# EAGLE board solar_collector_controller_V1.22 (EAGLE 6.5.0)
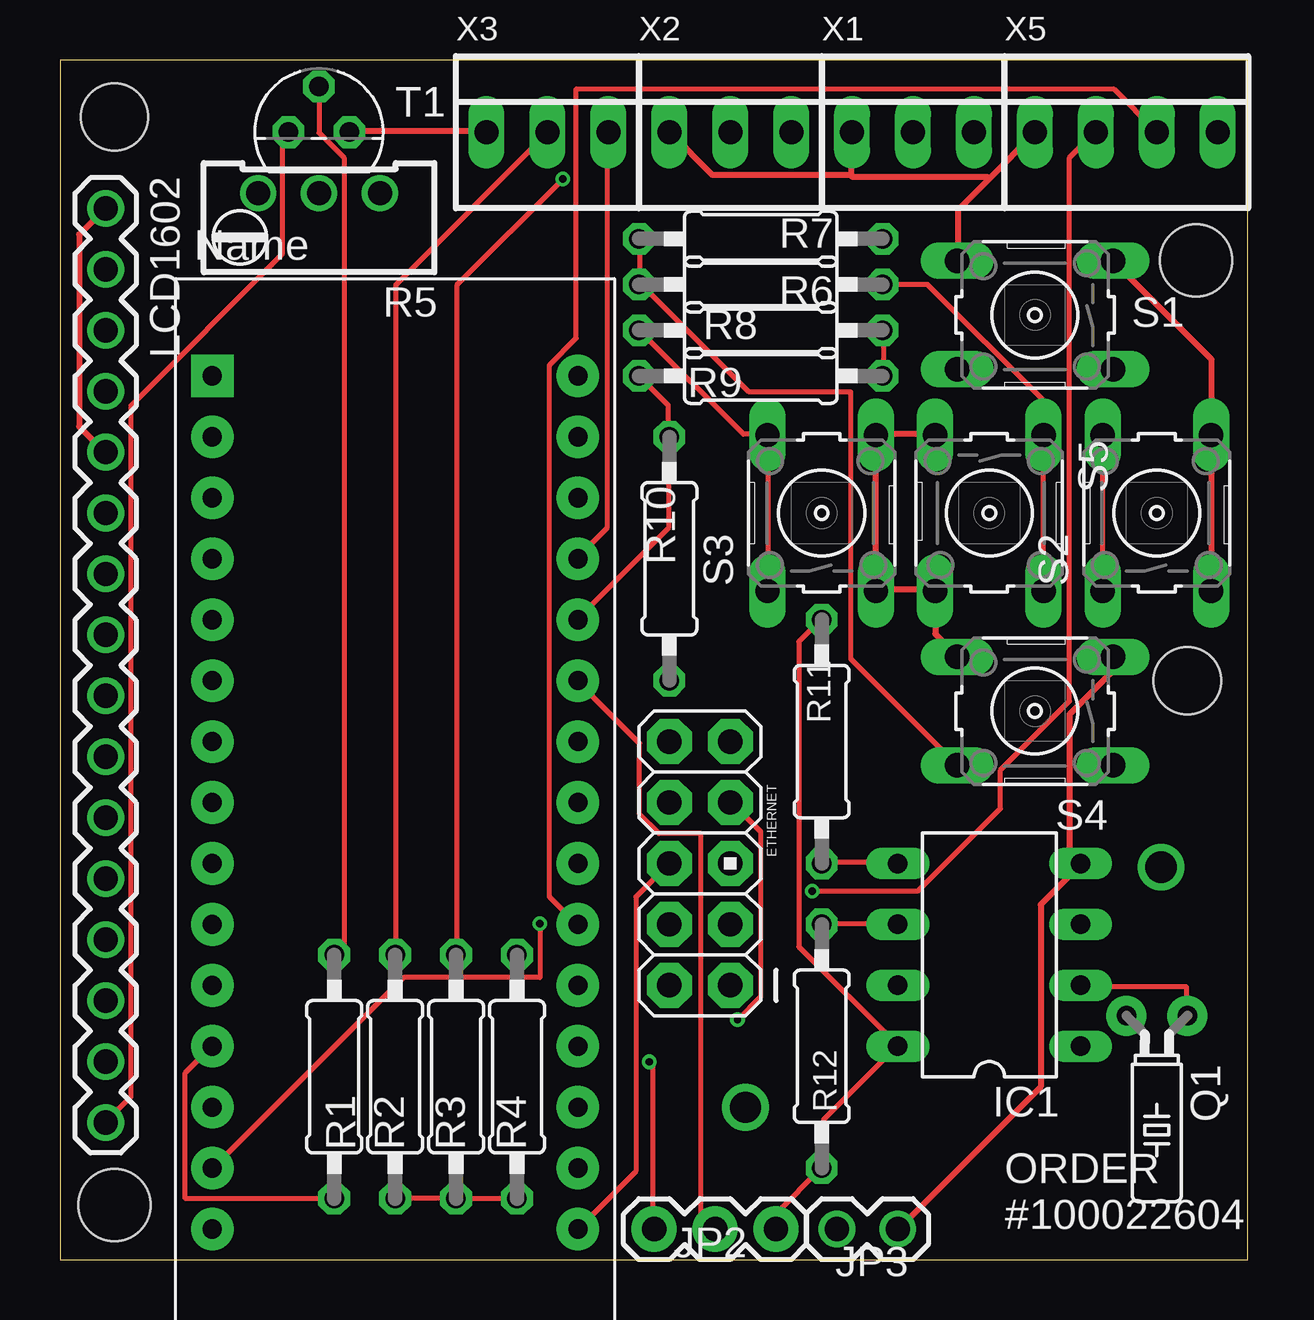
[diagram p0: board, top side]
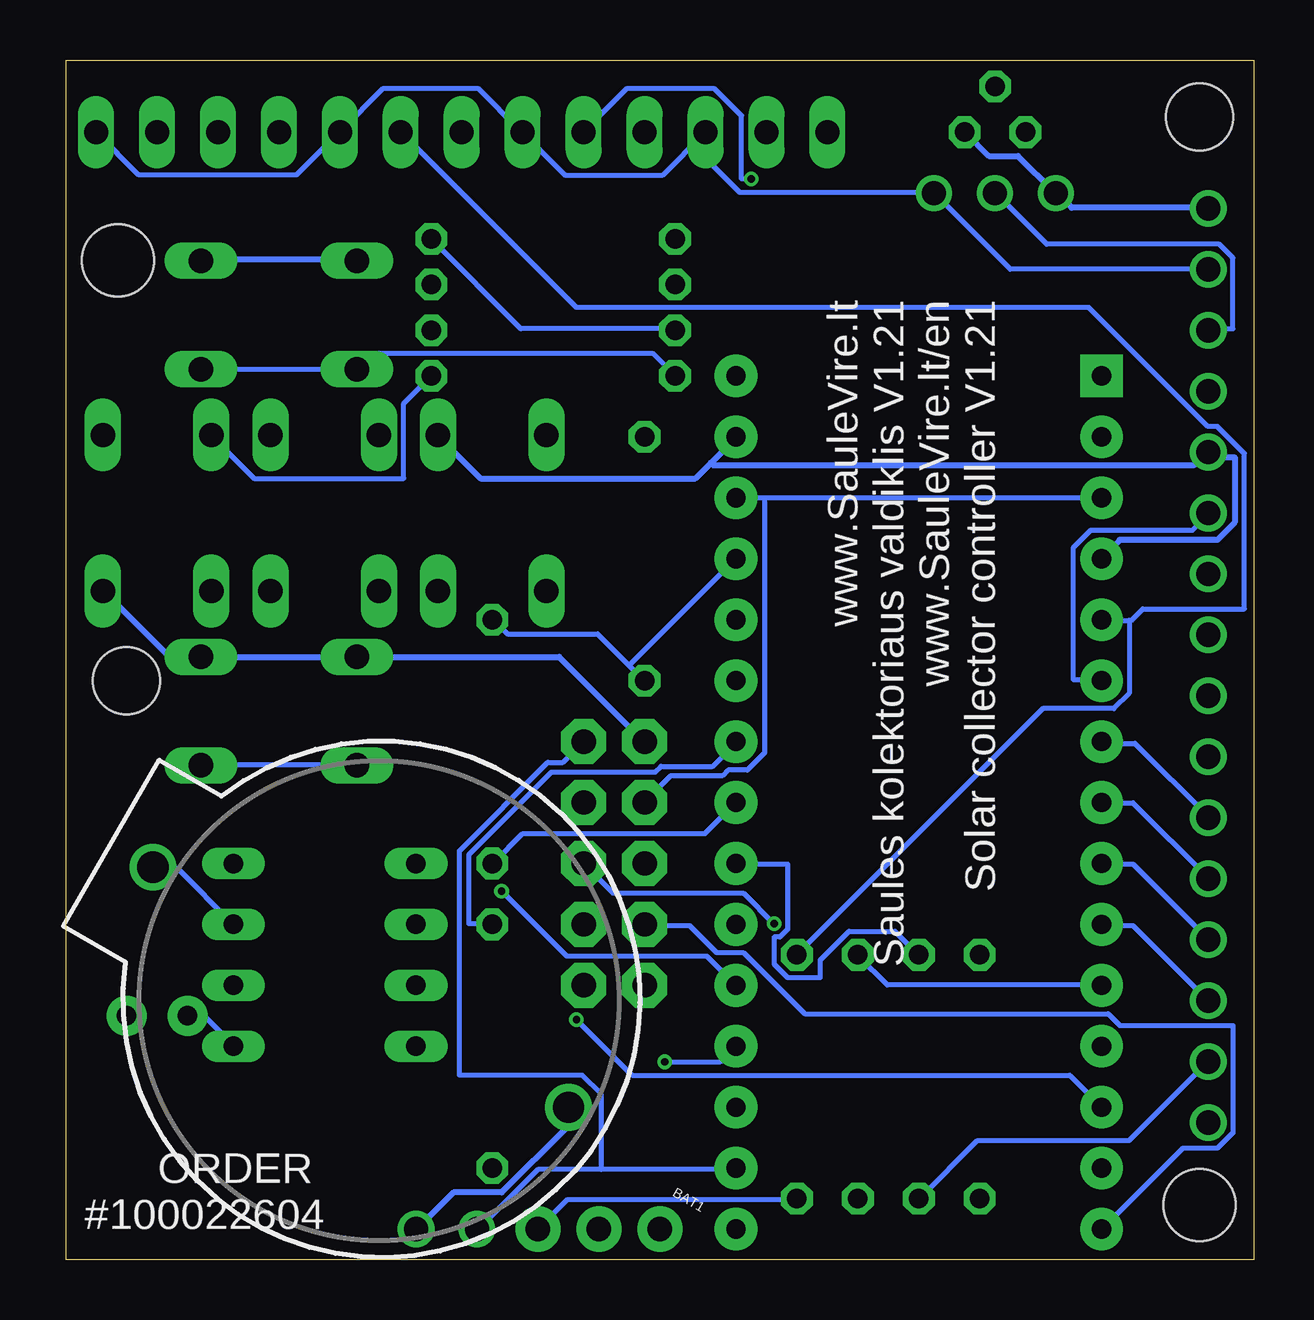
[diagram p1: board, bottom side, seen from below]

Size 49.51 x 50 mm. Coordinates in mm from the lower left corner, seen from the top.
Outline: 0,0 49.51,0 49.51,50 0,50 0,0
Copper layers (1*16): Top 0.035mm / dielectric 1.5mm / Bottom 0.035mm
Design rules "ITEADstudio_DRC": minimum track width 6mil, minimum drill 12mil, track to track 6mil, track to pad 6mil, pad to pad 6mil, via to via 6mil, smd to smd 0mil, copper to edge 10mil, drill to drill 10mil, minimum pad ring 10mil, minimum via ring 6mil, stop-mask expansion 2mil, vias tented up to drill 100mil, thermal gap 10mil
Net classes: 0 default: width 0.203 mm; 1 vcc: width 0.254 mm
Holes 3 mm at 2.27,2.27 47.35,41.64
Holes 2.8 mm at 2.27,47.62 46.99,24.13

## Footprints (pad centres in the part's own frame; a part is rotated, then mirrored left to right if it is on the bottom)
BATTCOM_20MM_PTH = drill 1.3: 1 20,0; 2 0,0
AVR_ICSP = drill 1.016 pad 1.88 octagon: 1 -1.27,5.08; 2 1.27,5.08; 3 -1.27,2.54; 4 1.27,2.54; 5 -1.27,0; 6 1.27,0; 7 -1.27,-2.54; 8 1.27,-2.54; 9 -1.27,-5.08; 10 1.27,-5.08
DIL08 = drill 0.813 long: 1 -3.81,-3.81; 2 -1.27,-3.81; 3 1.27,-3.81; 4 3.81,-3.81; 5 3.81,3.81; 6 1.27,3.81; 7 -1.27,3.81; 8 -3.81,3.81
1X03 = drill 1.016 pad 1.88: 1 0,0; 2 2.54,0; 3 5.08,0
1X02 = drill 1.016: 1 0,0; 2 2.54,0
16P-2.54 = drill 1.016: 1 0,0; 2 2.54,0; 3 5.08,0; 4 7.62,0; 5 10.16,0; 6 12.7,0; 7 15.24,0; 8 17.78,0; 9 20.32,0; 10 22.86,0; 11 25.4,0; 12 27.94,0; 13 30.48,0; 14 33.02,0; 15 35.56,0; 16 38.1,0
TC26H = drill 0.813 pad 1.676: 1 -1.27,0; 2 1.27,0
0207/10 = drill 0.813 octagon: 1 -5.08,0; 2 5.08,0
RTRIM64W = drill 1: 1 1.27,-2.54; 2 1.27,0; 3 1.27,2.54
B3F-10XX = drill 1.016 long: 1 -3.251,2.261; 2 3.251,2.261; 3 -3.251,-2.261; 4 3.251,-2.261
TO92 = drill 0.813 octagon: 1 1.27,0; 2 0,1.905; 3 -1.27,0
PDIP-32 = drill 0.8 pad 1.778: 3V3 15.24,-35.56; +5V 15.24,-10.16; A0 15.24,-30.48; A1 15.24,-27.94; A2 15.24,-25.4; A3 15.24,-22.86; A4 15.24,-20.32; A5 15.24,-17.78; A6 15.24,-15.24; A7 15.24,-12.7; AREF 15.24,-33.02; D0/RX 0,-5.08; D2 0,-12.7; D3 0,-15.24; D4 0,-17.78; D5 0,-20.32; D6 0,-22.86; D7 0,-25.4; D8 0,-27.94; D9 0,-30.48; D10 0,-33.02; D11 0,-35.56; D12 0,-38.1; D13 15.24,-38.1; GND 0,-10.16; GND1 15.24,-5.08; RESET 0,-7.62; RESET1 15.24,-7.62; VIN 15.24,-2.54 | drill 0.8 pad 1.778 square: D1/TX 0,-2.54
22-23-2031 = drill 1 long: 1 -2.54,0; 2 0,0; 3 2.54,0
22-23-2041 = drill 1 long: 1 -3.81,0; 2 -1.27,0; 3 1.27,0; 4 3.81,0

## Placement (x,y rotation side)
BAT1  [BATTCOM_20MM_PTH]  28.57,6.35 150 bottom
ETHERNET  ENC25J60  [AVR_ICSP]  26.67,16.51 180 top
IC1  DS1307  [DIL08]  38.73,12.7 90 top
JP2  A0 A6 +5V  [1X03]  29.84,1.27 180 top
JP3  GND 3.3V  [1X02]  32.38,1.27 0 top
LCD1602  LCD  [16P-2.54]  1.91,43.81 270 top
Q1  [TC26H]  45.72,10.16 180 top
R1  2k2  [0207/10]  11.43,7.62 270 top
R2  4k7  [0207/10]  13.97,7.62 90 top
R3  4k7  [0207/10]  16.51,7.62 90 top
R4  4k7  [0207/10]  19.05,7.62 90 top
R5  10k  [RTRIM64W]  10.79,43.18 90 top
R6  3k3  [0207/10]  29.21,40.64 180 top
R7  1k  [0207/10]  29.21,42.55 0 top
R8  620  [0207/10]  29.21,38.73 0 top
R9  330  [0207/10]  29.21,36.83 180 top
R10  2k  [0207/10]  25.4,29.21 270 top
R11  10k  [0207/10]  31.75,21.59 90 top
R12  10k  [0207/10]  31.75,8.89 270 top
S1  Right  [B3F-10XX]  40.64,39.37 180 top
S2  Up  [B3F-10XX]  45.72,31.11 90 top
S3  Down  [B3F-10XX]  31.75,31.11 90 top
S4  Left  [B3F-10XX]  40.64,22.86 180 top
S5  Select  [B3F-10XX]  38.73,31.11 270 top
T1  BC337  [TO92]  10.79,46.99 0 top
U$2  ARDUINONANO  [PDIP-32]  6.35,39.37 0 top
X1  VCC D2 GND  [22-23-2031]  35.56,46.99 0 top
X2  VCC D8 GND  [22-23-2031]  27.94,46.99 0 top
X3  VCC A3 GND  [22-23-2031]  20.32,46.99 0 top
X5  VCC A2 A1 GND  [22-23-2041]  44.45,46.99 0 top

## Library data of the parts
BAT1 = SparkFun-Electromechanical
ETHERNET JP2 = SparkFun-Connectors
IC1 = ds1307_pcf8583
JP3 = SparkFun
LCD1602 = Connector_seedstudio
Q1 = adafruit; OC_FARNELL: unknown; OC_NEWARK: unknown
R1-R12 = resistor
S1-S5 = switch-omron; MPN: B3F-1000; OC_FARNELL: 176432; OC_NEWARK: 36M3542
T1 = transistor
U$2 = rocketfarm
X1-X3 = con-molex; MF: MOLEX; MPN: 22-23-2031; OC_FARNELL: 1462950; OC_NEWARK: 30C0862
X5 = con-molex; MF: MOLEX; MPN: 22-23-2041; OC_FARNELL: 1462920; OC_NEWARK: 38C0355

## Nets
3.3V: ETHERNET.9 JP3.1 U$2.3V3
A0: JP2.3 U$2.A0
A1: U$2.A1 X5.2
A2: U$2.A2 X5.3
A3: R2.2 U$2.A3 X3.2
A4_SDA: IC1.5 R11.1 U$2.A4
A5: LCD1602.4
A5_SCL: IC1.6 R12.1 U$2.A5
A6: JP2.2 U$2.A6
A7: R9.2 R10.1 S1.1 S1.2 U$2.A7
D2: R4.2 U$2.D2 X1.2
D3: LCD1602.6 U$2.D3
D4: LCD1602.11 U$2.D4
D5: LCD1602.12 U$2.D5
D6: LCD1602.13 U$2.D6
D7: LCD1602.14 U$2.D7
D8: R3.2 U$2.D8 X2.2
D9: R1.2 U$2.D9
D10: ETHERNET.7 U$2.D10
D11: ETHERNET.5 U$2.D11
D12: ETHERNET.4 U$2.D12
D13: ETHERNET.6 U$2.D13
GND [vcc]: BAT1.2 ETHERNET.10 IC1.4 JP3.2 LCD1602.1 LCD1602.5 R5.3 S1.3 S1.4 S2.3 S2.4 S3.3 S3.4 S4.3 S4.4 S5.3 S5.4 T1.1 U$2.GND U$2.GND1 X1.1 X2.1 X3.1 X5.1
LCD16: LCD1602.16 T1.3
N$1: LCD1602.3 R5.2
N$2: IC1.1 Q1.2
N$3: IC1.2 Q1.1
N$4: R1.1 T1.2
N$5: R6.1 S5.1 S5.2
N$6: R6.2 R7.1 S4.1 S4.2
N$8: R7.2 R8.1 S3.1 S3.2
N$10: BAT1.1 IC1.3
N$11: R8.2 R9.1 S2.1 S2.2
RESET: ETHERNET.8 U$2.RESET U$2.RESET1
VCC: IC1.8 JP2.1 LCD1602.2 LCD1602.15 R2.1 R3.1 R4.1 R5.1 R10.2 R11.2 R12.2 U$2.+5V X1.3 X2.3 X3.3 X5.4

## Tracks (layer width: path | path; a pad name or v marks a point on that pad's centre or on a via)
3.3V
  Bottom 0.203: 27.2,3.76 21.6,3.76 U$2.3V3 | 27.2,3.76 29.84,3.76 32.32,1.28 JP3.1 | 27.2,3.76 27.2,6.88 28,7.68 33.12,7.68 33.12,17.04 29.44,20.72 28.8,20.72 28,21.52 ETHERNET.9
A0  (via drill 0.3)
  Top 0.203: v24.56,8.24 24.72,8.08 24.72,1.28 JP2.3
  Bottom 0.203: U$2.A0 22.24,8.24 v24.56,8.24
A1  (via drill 0.3)
  Top 0.203: v31.36,15.36 35.76,15.36 39.2,18.8 39.2,20.4 42.08,23.28 42.08,45.92 43.12,46.96 X5.2
  Bottom 0.203: v31.36,15.36 28.64,12.64 22.8,12.64 U$2.A1
A2
  Top 0.203: X5.3 45.68,47.04 43.92,48.8 21.52,48.8 21.52,38.4 20.4,37.28 20.4,15.12 21.52,14 U$2.A2
A3
  Top 0.203: X3.2 20.32,46.96 14,40.64 14,12.72 R2.2
  Bottom 0.203: R2.2 14,12.72 14.96,13.68 16.88,13.68 18.08,12.48 18.08,11.76 19.44,11.76 20,12.32 20,13.44 19.76,13.44 19.44,13.76 19.44,16.48 21.52,16.48 U$2.A3
A4_SDA
  Top 0.203: R11.1 31.76,16.56 34.88,16.56 IC1.5
  Bottom 0.203: U$2.A4 22.88,17.76 30.48,17.76 31.68,16.56 R11.1
A5_SCL
  Top 0.203: R12.1 31.76,14 34.88,14 IC1.6
  Bottom 0.203: U$2.A5 21.6,21.52 22.56,20.56 24.72,20.56 24.96,20.32 29.28,20.32 32.72,16.88 32.72,14 31.76,14 R12.1
A6
  Top 0.203: U$2.A6 21.6,24.08 24.16,21.52 24.16,18.56 24.96,17.76 26.72,17.76 26.72,1.84 27.28,1.28 JP2.2
A7
  Top 0.203: R9.2 25.36,35.6 25.36,34.32 R10.1 25.36,34.24 25.36,30.48 21.6,26.72 U$2.A7
  Bottom 0.203: S1.1 43.84,37.12 37.44,37.12 S1.2 37.36,37.2 36.8,37.76 25.04,37.76 24.16,36.88 R9.2
D2
  Bottom 0.203: 5.2,26.64 5.2,23.6 5.84,22.96 8.8,22.96 19.04,12.72 R4.2 | 5.2,26.64 6.32,26.64 U$2.D2 | X1.2 35.52,46.96 28.24,39.68 6.88,39.68 1.92,34.72 1.52,34.72 0.4,33.6 0.4,27.12 4.64,27.12 5.12,26.64 5.2,26.64
D3
  Bottom 0.203: LCD1602.6 1.92,31.04 2.56,30.4 6.8,30.4 7.52,29.68 7.52,24.16 6.4,24.16 U$2.D3
D4
  Bottom 0.203: LCD1602.11 1.92,18.48 4.96,21.52 6.32,21.52 U$2.D4
D5
  Bottom 0.203: LCD1602.12 1.92,15.92 5.04,19.04 6.32,19.04 U$2.D5
D6
  Bottom 0.203: LCD1602.13 1.92,13.36 5.04,16.48 6.32,16.48 U$2.D6
D7
  Bottom 0.203: LCD1602.14 5.04,13.92 6.32,13.92 U$2.D7
D8  (via drill 0.3)
  Top 0.203: v20.96,45.04 16.56,40.64 16.56,12.72 R3.2
  Bottom 0.203: R3.2 16.48,12.64 15.28,11.44 6.4,11.44 U$2.D8 | v20.96,45.04 21.36,45.04 21.36,47.68 22.48,48.8 26.16,48.8 27.92,47.04 X2.2
D9
  Top 0.203: R1.2 11.36,2.56 5.2,2.56 5.2,7.76 6.32,8.88 U$2.D9
D10  (via drill 0.3)
  Top 0.203: v28.24,10 29.2,10.96 29.2,17.84 28,19.04 ETHERNET.7
  Bottom 0.203: U$2.D10 7.68,7.68 25.92,7.68 v28.24,10
D11  (via drill 0.3)
  Top 0.203: v20,14 20,11.76 14.32,11.76 6.4,3.84 U$2.D11
  Bottom 0.203: v20,14 21.28,15.28 26.72,15.28 27.92,16.48 ETHERNET.5
D12
  Bottom 0.203: U$2.D12 6.32,1.28 2.96,4.64 1.52,4.64 0.88,5.28 0.88,9.76 5.6,9.76 6.08,10.24 18.72,10.24 21.28,12.8 22.4,12.8 23.52,13.92 25.36,13.92 ETHERNET.4
D13
  Top 0.203: U$2.D13 24,3.68 24,15.12 25.36,16.48 ETHERNET.6
GND
  Top 0.254: T1.1 12.08,47.04 17.76,47.04 X3.1 | LCD1602.5 1.84,33.68 0.8,34.72 0.8,42.72 1.84,43.76 LCD1602.1 | S5.3 36.4,34.4 34.08,34.4 S3.4 34,34.24 34,28 S3.3 34.08,27.92 36.4,27.92 S5.4 36.48,27.76 36.48,26.08 37.36,25.2 S4.4 | 32.96,45.2 27.2,45.2 25.44,46.96 X2.1 | 32.96,45.2 32.96,46.96 X1.1 | 38.72,45.04 37.44,43.76 37.44,41.68 S1.4 | 38.72,45.04 40.64,46.96 X5.1 | 32.96,45.2 33.04,45.12 38.64,45.12 38.72,45.04 | S4.3 43.84,25.12 43.84,24.48 42.08,22.72 42.08,16.96 42.48,16.56 IC1.4 42.48,16.4 40.88,14.8 40.88,7.2 34.96,1.28 JP3.2 | S2.3 48,27.92 48,34.32 S2.4 48,34.48 48,37.52 43.92,41.6 S1.3
  Bottom 0.254: T1.1 12,46.96 11.04,46 9.84,46 8.32,44.48 R5.3 8.16,44.4 7.6,43.84 1.92,43.84 LCD1602.1 | U$2.GND 6.32,29.28 5.6,30 1.52,30 0.8,30.72 0.8,33.44 1.68,33.44 1.84,33.6 LCD1602.5 2,33.6 2.48,33.12 22.56,33.12 22.64,33.2 | 22.64,33.2 23.28,32.56 32.24,32.56 34,34.32 S3.4 | 22.64,33.2 21.6,34.24 U$2.GND1 | ETHERNET.10 25.44,21.6 28.96,25.12 37.36,25.12 S4.4 37.44,25.12 43.76,25.12 S4.3 43.92,25.2 45.28,25.2 47.92,27.84 S2.3 | S1.3 43.84,41.68 37.44,41.68 S1.4 | JP3.2 34.88,1.28 33.36,2.8 31.36,2.8 28.64,5.52 28.64,6.32 BAT1.2
LCD16
  Top 0.203: T1.3 9.52,46.96 9.28,46.72 9.28,41.92 2.96,35.6 2.96,6.8 1.92,5.76 LCD1602.16
N$1
  Bottom 0.203: R5.2 10.72,44.4 8.64,42.32 1.44,42.32 0.88,41.76 0.88,38.8 1.84,38.8 LCD1602.3
N$2
  Bottom 0.203: Q1.2 43.76,10.16 42.56,8.96 IC1.1
N$3
  Top 0.203: IC1.2 42.56,11.36 46.96,11.36 46.96,10.16 Q1.1
N$4
  Top 0.203: R1.1 11.44,12.72 11.84,13.12 11.84,45.92 10.8,46.96 10.8,48.88 T1.2
N$5
  Top 0.203: R6.1 36.16,40.64 40.96,35.84 40.96,34.4 S5.1 40.96,34.32 40.96,27.92 S5.2
N$6
  Top 0.203: R7.1 24.16,42.48 24.16,40.64 R6.2 24.24,40.64 28.72,36.16 32.96,36.16 32.96,25.04 37.36,20.64 S4.2
  Bottom 0.203: S4.2 37.44,20.64 43.84,20.64 S4.1
N$8
  Top 0.203: R8.1 24.16,38.72 28.48,34.4 29.44,34.4 S3.2 29.52,34.32 29.52,27.92 S3.1
  Bottom 0.203: R7.2 34.24,42.48 30.56,38.8 24.16,38.8 R8.1
N$10
  Bottom 0.203: IC1.3 42.56,14 44.88,16.32 45.84,16.32 BAT1.1
N$11
  Top 0.203: R9.1 34.32,36.88 34.32,38.72 R8.2 | S2.1 43.44,27.92 43.44,34.32 S2.2
  Bottom 0.203: R9.1 35.44,35.68 35.44,32.56 41.68,32.56 43.44,34.32 S2.2
RESET
  Bottom 0.203: 20.4,31.76 21.52,31.76 U$2.RESET1 | 20.4,31.76 6.4,31.76 U$2.RESET | 20.4,31.76 20.4,21.12 21.12,20.4 21.92,20.4 22.16,20.16 24.32,20.16 25.36,19.12 ETHERNET.8
VCC
  Top 0.203: JP2.1 29.92,1.28 29.92,2 31.68,3.76 R12.2 31.84,3.84 31.84,5.84 34.88,8.88 IC1.8 34.88,8.96 30.8,13.04 30.8,25.76 31.68,26.64 R11.2 | R2.1 14,2.56 16.48,2.56 R3.1 16.56,2.56 19.04,2.56 R4.1 | U$2.+5V 21.6,29.28 22.8,30.48 22.8,46.96 X3.3
  Bottom 0.203: LCD1602.15 5.2,4.96 11.52,4.96 13.92,2.56 R2.1 | JP2.1 28.64,2.48 19.12,2.48 R4.1 | 26.04,24.76 27.36,26.08 31.12,26.08 31.68,26.64 R11.2 | 26.04,24.76 25.44,24.16 R10.2 | 26.04,24.76 U$2.+5V | LCD1602.2 10.16,41.28 13.28,44.4 R5.1 13.36,44.48 21.44,44.48 23.36,46.4 X3.3 22.88,46.96 24.64,45.2 28.72,45.2 30.48,46.96 X2.3 30.56,47.04 32.32,48.8 36.32,48.8 38.08,47.04 X1.3 38.16,46.96 39.92,45.2 46.48,45.2 48.24,46.96 X5.4

## Text on the board
tPlace: ORDER / #100022604
bPlace: www.SauleVire.lt / Saules kolektoriaus valdiklis V1.21 / www.SauleVire.lt/en / Solar collector controller V1.21 | ORDER / #100022604